# EAGLE board SENSOR_BOARD_2_1_layer_final_version_april152015 (EAGLE 6.6.0)
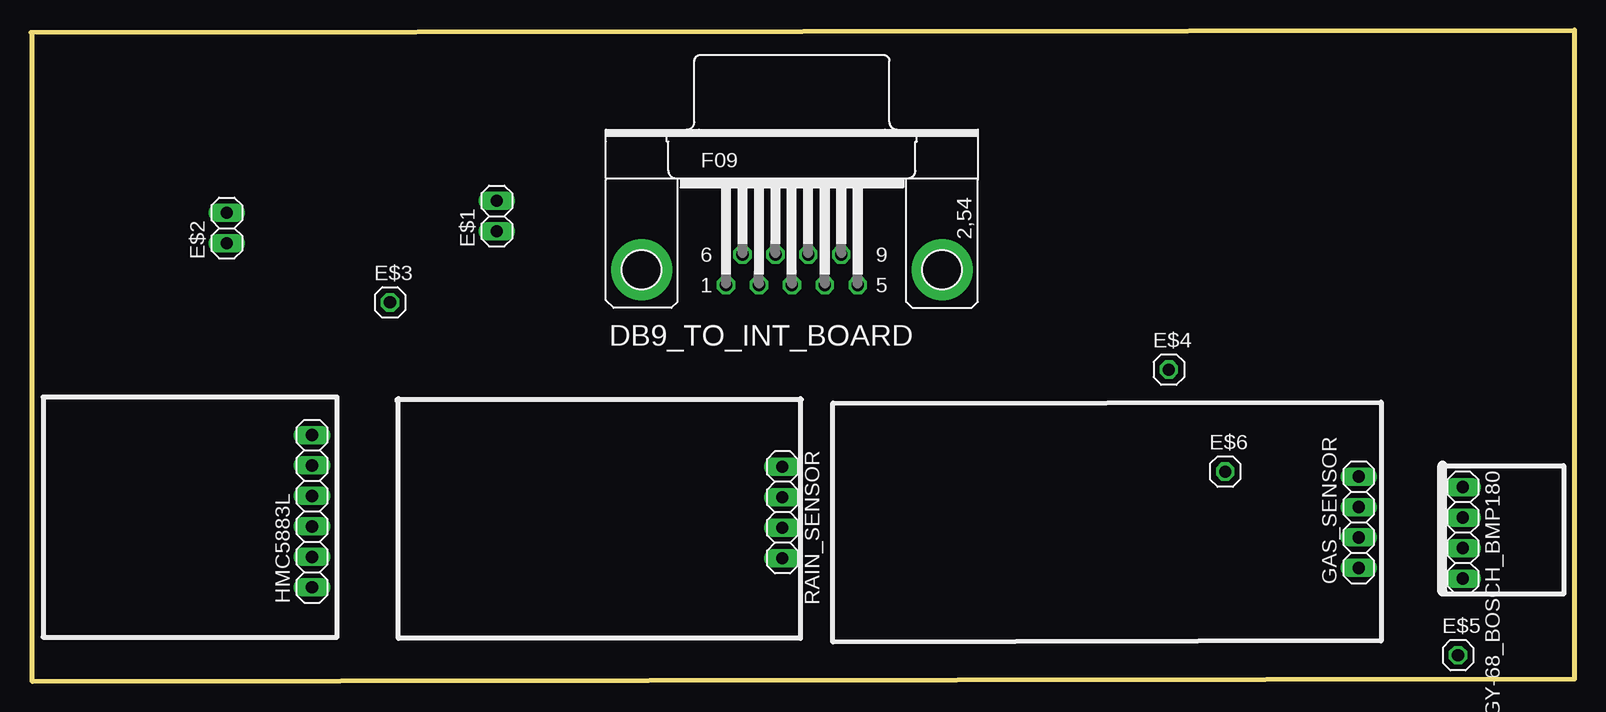
[diagram p0: board, top side]
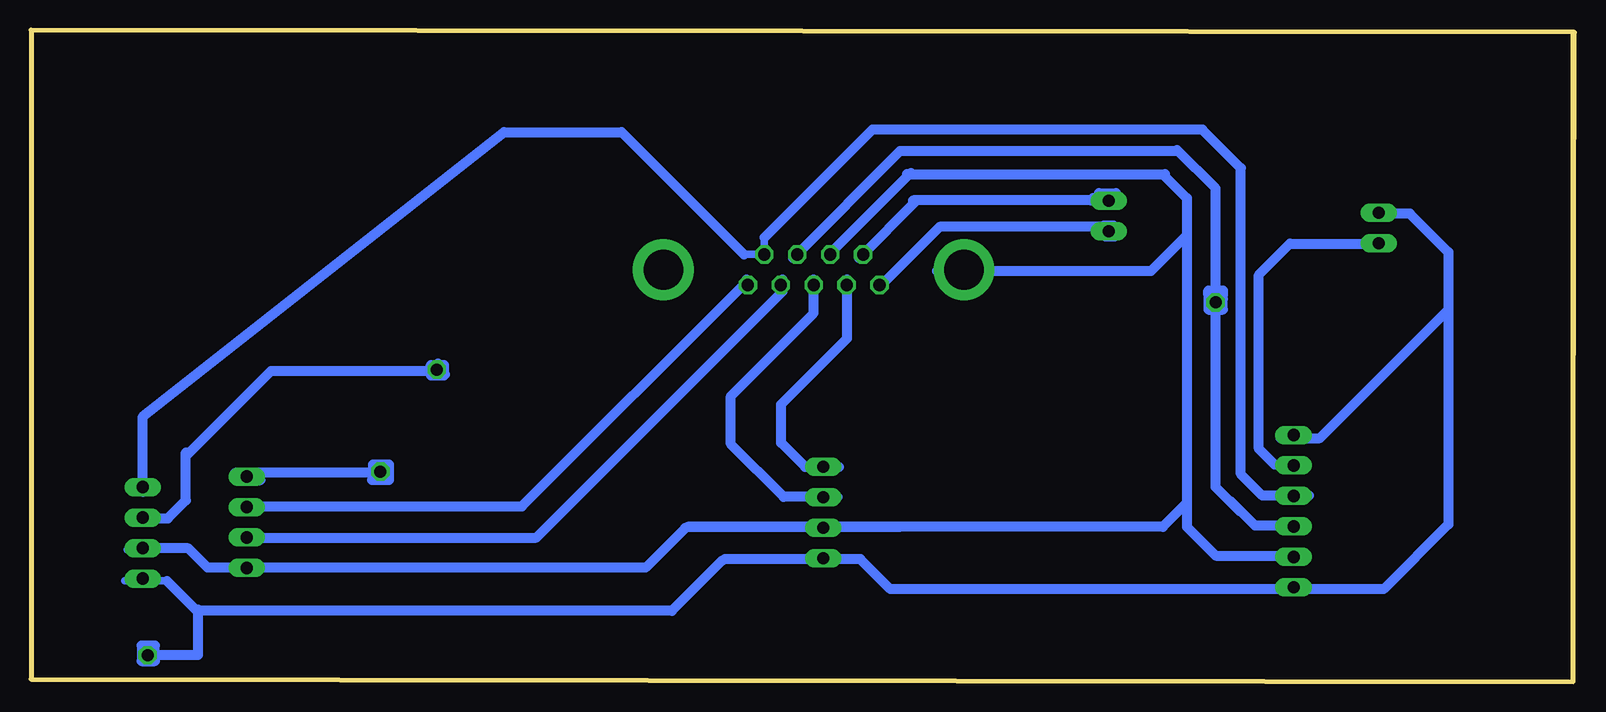
[diagram p1: board, bottom side, seen from below]

Size 128.8 x 54.3 mm. Coordinates in mm from the lower left corner, seen from the top.
Outline: 0.1,54.1 128.7,54.3 128.7,0.2 0.2,0 0.2,54
Outline: 0.1,0.1 128.7,0.1 128.8,54.2 0,54.2 0.1,0.1
Copper layers (1*16): Top 0.035mm / dielectric 1.5mm / Bottom 0.035mm
Design rules "default": minimum track width 10mil, minimum drill 24mil, track to track 8mil, track to pad 8mil, pad to pad 8mil, via to via 8mil, smd to smd 8mil, copper to edge 40mil, drill to drill 8mil, minimum pad ring 10mil, minimum via ring 8mil, stop-mask expansion 4mil, vias tented up to drill 0mil, thermal gap 10mil

## Footprints (pad centres in the part's own frame; a part is rotated, then mirrored left to right if it is on the bottom)
F09HP = drill 1.016 octagon: 1 -5.486,-1.27; 2 -2.743,-1.27; 3 0,-1.27; 4 2.743,-1.27; 5 5.486,-1.27; 6 -4.115,1.27; 7 -1.372,1.27; 8 1.372,1.27; 9 4.115,1.27 | drill 3.302 pad 5.08: G1 -12.522,0; G2 12.522,0
1X02 = drill 1.016 long: 1 -1.27,0; 2 1.27,0
1X01 = drill 1.016 octagon: 1 0,0
1X04 = drill 1.016 long: 1 -3.81,0; 2 -1.27,0; 3 1.27,0; 4 3.81,0
1X06 = drill 1.016 long: 1 -6.35,0; 2 -3.81,0; 3 -1.27,0; 4 1.27,0; 5 3.81,0; 6 6.35,0

## Placement (x,y rotation side)
DB9_TO_INT_BOARD  [F09HP]  63.49,34.32 0 top
E$1  [1X02]  38.9,38.8 90 top
E$2  [1X02]  16.4,37.8 90 top
E$3  [1X01]  30,31.6 0 top
E$4  [1X01]  94.9,26 0 top
E$5  [1X01]  119,2.2 0 top
E$6  [1X01]  99.6,17.5 0 top
GAS_SENSOR  P1_GND, P2_A0, P3_D0, P4_5V  [1X04]  110.73,13.28 90 top
GY-68_BOSCH_BMP180  P1_5V, P2_GND, P3_SCL, P4_SDA  [1X04]  119.4,12.4 270 top
HMC5883L  P1_VCC_5V, P2_GND, P3_SCL, P4_SDA, P5_DRDY, P6_3V3  [1X06]  23.5,14.2 90 top
RAIN_SENSOR  P1_5V, P2_GND, P3_D0, P4_A0  [1X04]  62.7,14.1 270 top

## Library data of the parts
DB9_TO_INT_BOARD = con-subd; OC_FARNELL: unknown; OC_NEWARK: unknown
E$1-E$6 GAS_SENSOR GY-68_BOSCH_BMP180 HMC5883L RAIN_SENSOR = pinhead

## Nets
N$9: HMC5883L.5

## Tracks (layer width: path | path; a pad name or v marks a point on that pad's centre or on a via)
S$1
  Bottom 0.61: 54.9,40.1 38.3,40.1
  Bottom 0.813: 59.7,35.3 54.9,40.1
S$2
  Bottom 0.61: 56.3,12.8 74.2,12.8 | 114,9.5 114.1,9.5
  Bottom 0.813: 74.2,12.8 77.5,9.5 114,9.5 115.6,11.1 120.4,11.1
S$3
  Bottom 0.813: 70.9,10.2 59.6,10.2 57.1,7.7 16,7.7 10.6,13.1 10.6,35.8 13.8,39 17,39
S$4
  Bottom 0.61: 120.6,11.1 120.7,11
S$5
  Bottom 0.61: 22.3,18.1 25.1,18.1
  Bottom 0.813: 25.1,18.1 26.4,19.4 26.4,33.9 23.8,36.5 15.5,36.5
S$6
  Bottom 0.813: 111.7,14.6 87.8,14.6 69.1,33.3 69.1,33.5
S$7
  Bottom 0.813: 111.7,12 86.6,12 66.1,32.5 66.1,33.5
S$8
  Bottom 0.813: 62.3,35.5 55.4,42.4
S$9
  Bottom 0.813: 22.5,13 26.7,13 28.7,15
S$10
  Bottom 0.61: 33.2,44.3 33.3,44.3
  Bottom 0.813: 28,14.2 30,16.2 30,41.1 33.2,44.3
S$11
  Bottom 0.61: 69.3,35.6 67.2,35.6
  Bottom 0.813: 119.4,15.8 119.4,22.1 89.3,45.8 79.5,45.8 69.3,35.6
S$12
  Bottom 0.813: 33.2,44.2 56.3,44.2 65.2,35.3
S$13
  Bottom 0.61: 15.9,39.4 16.7,39.4
S$14
  Bottom 0.813: 24.6,20.3 21.3,20.3 10.7,30.9
S$15
  Bottom 0.813: 55.7,42.3 34.2,42.3
S$16
  Bottom 0.61: 67.6,37 67.6,35.1
  Bottom 0.813: 22.2,15.5 26.1,15.5 27.9,17.3 27.9,42.8 31.1,46 58.6,46 67.6,37
S$17
  Bottom 0.61: 32.4,15 32.4,14.9 | 22.8,10.5 22.7,10.4
  Bottom 0.813: 34.3,42.2 32.4,40.3 32.4,15 | 74,12.9 34.4,12.9 32.4,14.9 32.4,12.9 30,10.5 22.8,10.5
S$18
  Bottom 0.813: 61.5,15.4 66,15.4 70.4,19.8 70.4,23.8 63.5,30.7 63.5,33.5
S$19
  Bottom 0.813: 61.4,17.9 64.2,17.9 66.2,19.9 66.2,23.1 60.7,28.6 60.7,33.5
S$20
  Bottom 0.406: 115.8,19.1 115.8,19.3
  Bottom 0.813: 120.2,13.6 117.3,13.6 115.8,15.1 115.8,18.8 | 115.8,18.8 115.8,19.1 | 115.8,18.8 108.7,25.9 95.1,25.9 94.8,25.6 94.2,25.6
S$21
  Bottom 0.61: 117.4,8.4 120.9,8.4
  Bottom 0.813: 71.1,10.1 75.3,5.9 114.9,5.9 117.4,8.4
S$22
  Bottom 0.61: 38.7,37.4 39.2,37.9 | 58.2,32.7 58.3,32.7
  Bottom 0.813: 39.2,37.9 53,37.9 58.2,32.7
S$23
  Bottom 0.61: 38.5,38.1 38.4,38 38.4,37 39.2,37 39.4,37.2 39.4,38 39.3,38.1 38.6,38.1 38.9,37.8 38.9,37.2
S$24
  Bottom 0.813: 32.5,37.1 35.4,34.2 53.2,34.2
S$25
  Bottom 0.406: 64.9,35.1 64.9,36.1
S$26
  Bottom 0.813: 29.9,32.6 29.4,32.6 29.4,32.2 30.6,32.2 | 30.6,32.2 30.6,32.6 | 30.6,32.2 30.6,31 29.4,31 29.4,31.9
S$27
  Bottom 0.813: 114.8,6 114.8,2.2 118.4,2.2 | 118.4,2.2 119,2.2 | 118.4,2.2 118.4,3 119.5,3 119.5,1.7 118.4,1.7
S$28
  Bottom 0.813: 99.2,17.5 99.2,17.4 111.7,17.4 111.7,16.8 109.6,16.8
S$29
  Bottom 0.813: 100.2,17.5 100.2,18.1 98.9,18.1 98.9,16.8 100.3,16.8
S$30
  Bottom 0.813: 94.8,26.5 94.8,26.4 94.3,26.4 94.3,25.5 95.4,25.5 95.4,26.4
S$31
  Bottom 0.813: 38.2,40.6 38.2,39.7 39.7,39.7 39.7,40.7 38.3,40.7
S$32
  Bottom 0.813: 40.2,40.3 40.4,40.1 55.2,40.1